# Altium PCB PCB.PcbDoc
Units mm, origin at the board's own origin, x right, y up, seen from the top; angles counter-clockwise.
Board outline 100 x 70 mm, 2 copper layers (Top Layer, Bottom Layer); 25 components, 41 nets, 129 pads, 9 vias.
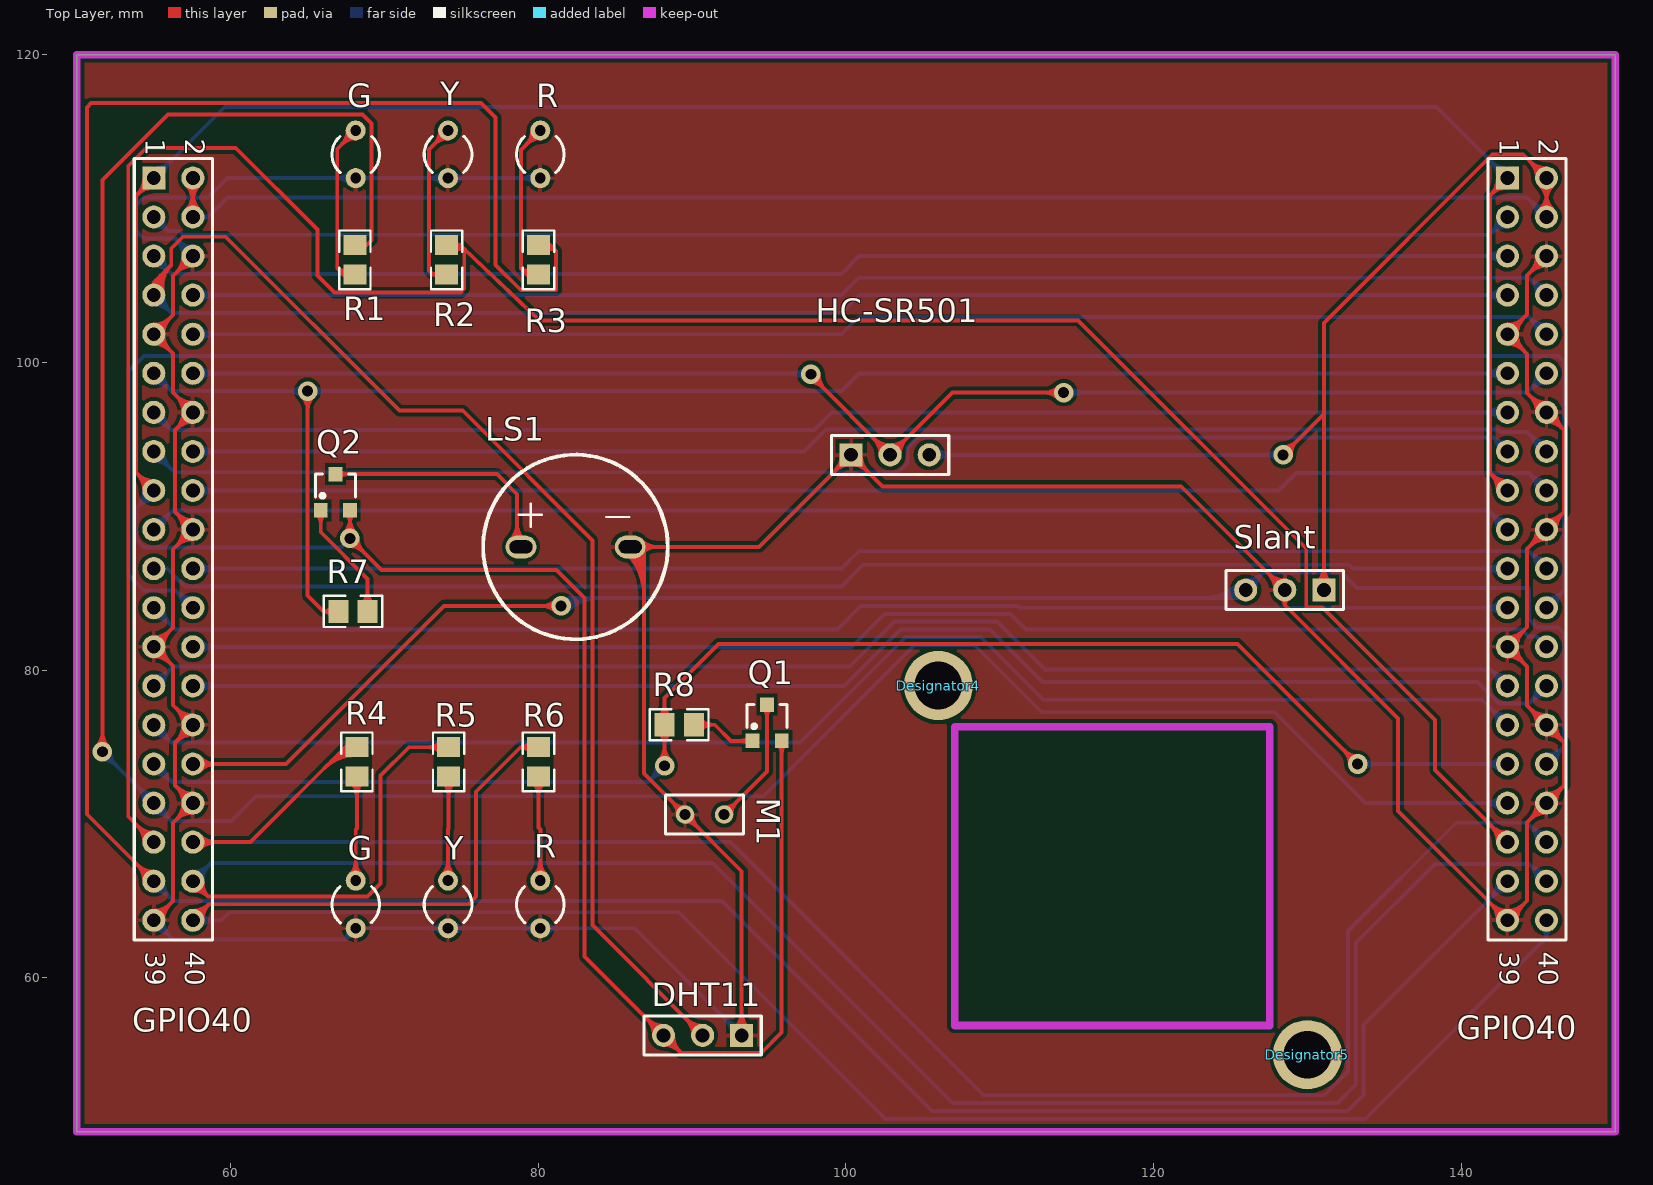
[diagram p0: Top Layer view]
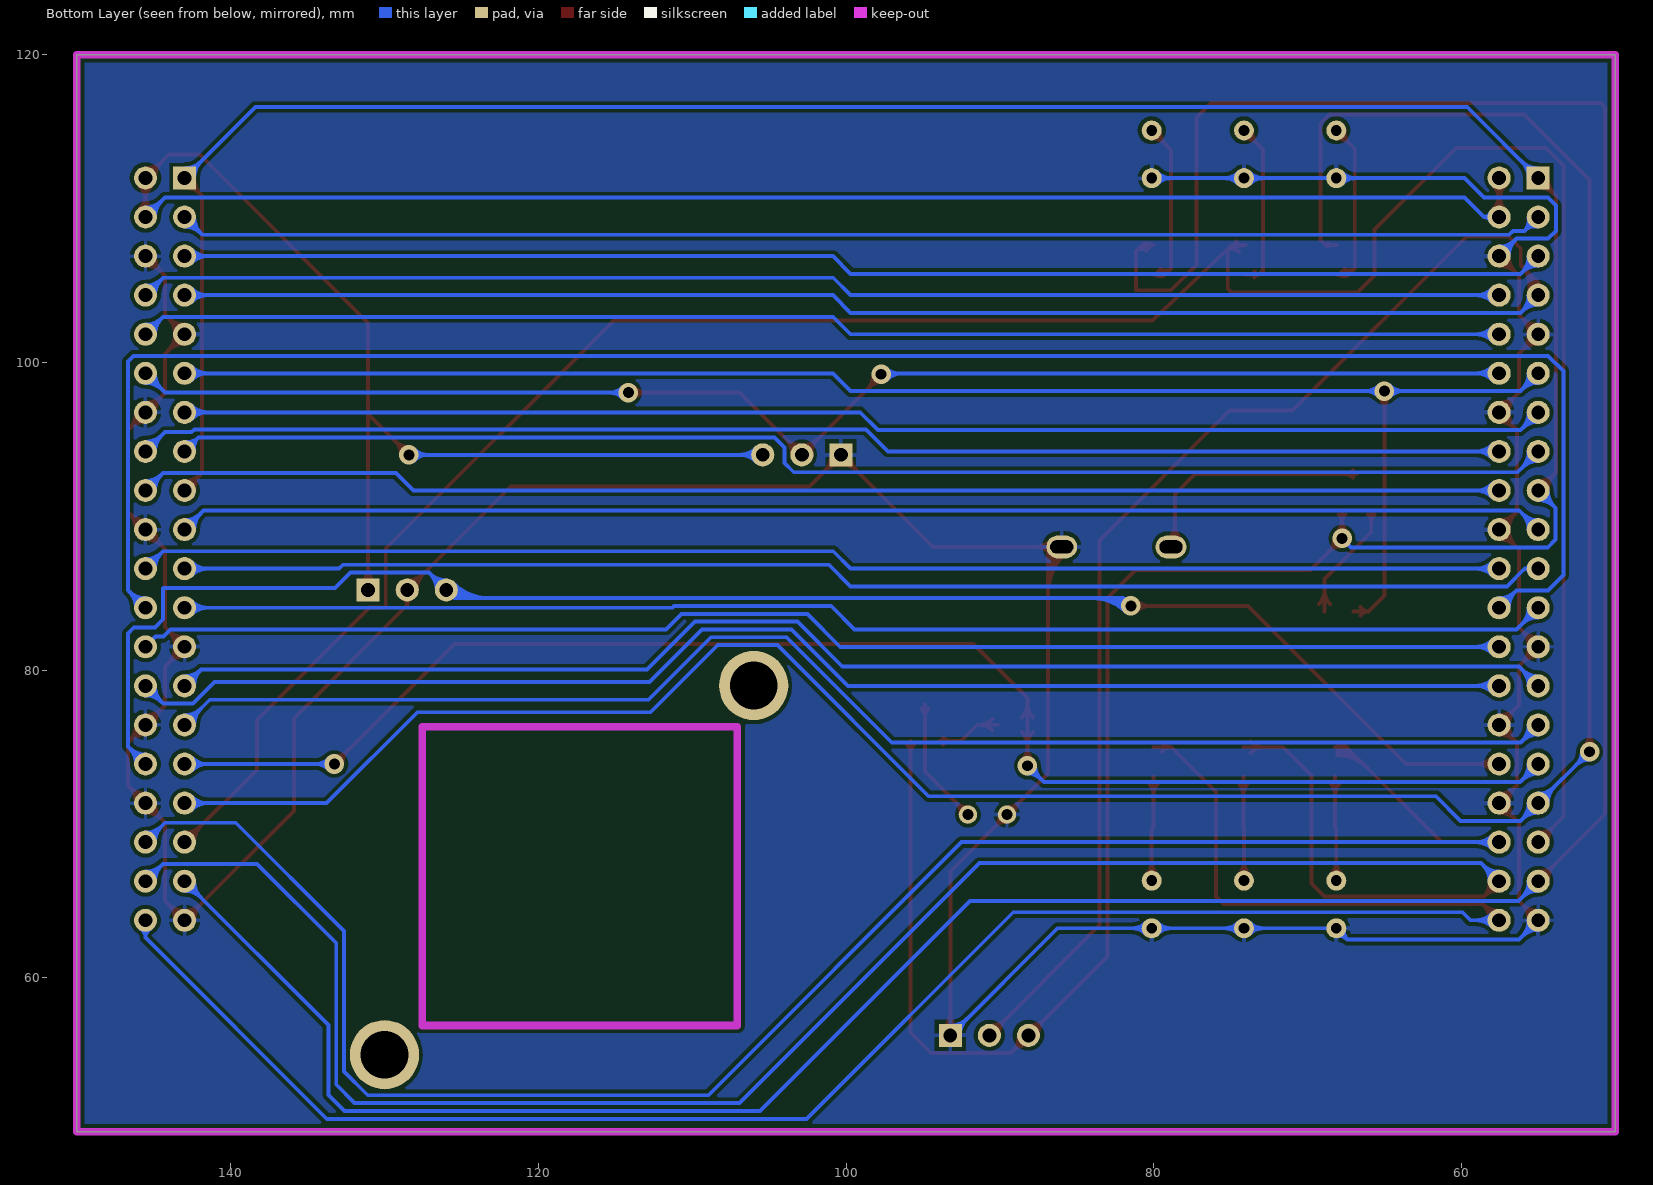
[diagram p1: Bottom Layer view, seen from below]

## Layer stack, top to bottom
Top Layer: signal copper 0.0356
Dielectric: dielectric 0.32, FR-4, Dk 4.8
Bottom Layer: signal copper 0.0356

## Board outline
50,50 150,50 150,120 50,120

## Design rules (kind name [scope] priority, off if disabled: settings)
Clearance [All] p1: gap=0.254
PolygonConnect [All] p1: connectstyle=Relief reliefconductorwidth=0.254 reliefentries=4 polygonreliefangle="90 Angle"
RoutingVias [All] p1: holewidth=0.711 width=1.27 viastyle="Through Hole" minholewidth=0.711 minwidth=1.27 maxholewidth=0.711 maxwidth=1.27
SilkscreenOverComponentPads [All] p1: minsilkscreentomaskgap=0.254
SolderMaskExpansion [All] p1: expansion=0.102
Width [All] p1: maxlimit=0.254 minlimit=0.254 preferedwidth=0.254
27 further rules are at their usual default settings.

## Classes and differential pairs
component class Sheet: DHT11 G GPIO40 HC-SR501 LS1 M1 Q1 Q2 R R1 R2 R3 R4 R5 R6 R7 R8 Slant Y

## Components (designator, comment, footprint, x,y, rotation, side; value= is the part's Value field where it differs from the comment)
Designator4 "Comment" HOLE-4MM#1 113.665,56.515 r0 top
Designator5 "Comment" HOLE-4MM#2 130.81,55.118 r0 top
DHT11 "DHT11" HDR1X3 93.218,56.261 r180 top (schematic designator P2)
G "LED_B" R38 68.127,113.538 r0 top (schematic designator D1)
G "LED_B" R38 68.127,64.77 r0 top (schematic designator D4)
GPIO40 "GPIO40" HDR2X20 143,112 r270 top (schematic designator P1)
GPIO40 "GPIO40" HDR2X20 55,112 r270 top (schematic designator P5)
HC-SR501 "HC-SR501" HDR1X3 100.33,94 r0 top (schematic designator P4)
LS1 "Bell" BUZZ12 82.423,88.011 r0 top
M1 "Meter" RAD-0.1 90.805,70.612 r0 top
Q1 "2YT8550" SOT-23-3 94.869,76.581 r0 top
Q2 "2YT8550" SOT-23-3 66.802,91.567 r0 top
R "LED_R" R38 80.127,113.538 r0 top (schematic designator D3)
R "LED_R" R38 80.127,64.77 r0 top (schematic designator D6)
R1 "1k" R0805 68.072,106.68 r90 top
R2 "1k" R0805 74.041,106.68 r90 top
R3 "1k" R0805 80.01,106.68 r90 top
R4 "1k" R0805 68.199,74.041 r270 top
R5 "1k" R0805 74.168,74.041 r270 top
R6 "1k" R0805 80.01,74.041 r270 top
R7 "1k" R0805 67.945,83.82 r0 top
R8 "1k" R0805 89.154,76.454 r0 top
Slant "Slant" HDR1X3 131.064,85.217 r180 top (schematic designator P3)
Y "LED_Y" R38 74.127,113.538 r0 top (schematic designator D2)
Y "LED_Y" R38 74.127,64.77 r0 top (schematic designator D5)

## Footprints (in the part's own frame and the unit in brackets; to place one, negate y for a bottom-side part, rotate by r counter-clockwise, add the part's x,y. Pads: shape width x height; smd on the part's side, far side on the other; paste and mask are expansions set on the pad)
BUZZ12 [mm]
  oval 2x1.5 hole 0.85 slot 1.5 at 0 deg: 1(-3.55,0) 2(3.55,0)
  silkscreen extent -6.01,-6 5.99,6
HDR1X3 [mm] "Connector; Header; 3 Position"
  rect 1.5x1.5 hole 0.9: 1(0,0)
  round 1.5 hole 0.9: 2(2.54,0) 3(5.08,0)
  silkscreen extent -1.27,-1.27 6.35,1.27
HDR2X20 [mm] "Connector; Header; 20x2 Position"
  rect 1.5x1.5 hole 0.9: 1(0,0)
  round 1.5 hole 0.9: 2(0,2.54) 3(2.54,0) 4(2.54,2.54) 5(5.08,0) 6(5.08,2.54) 7(7.62,0) 8(7.62,2.54) 9(10.16,0) 10(10.16,2.54) 11(12.7,0) 12(12.7,2.54) 13(15.24,0) 14(15.24,2.54) 15(17.78,0) 16(17.78,2.54) 17(20.32,0) 18(20.32,2.54) 19(22.86,0) 20(22.86,2.54) 21(25.4,0) 22(25.4,2.54) 23(27.94,0) 24(27.94,2.54) 25(30.48,0) 26(30.48,2.54) 27(33.02,0) 28(33.02,2.54) 29(35.56,0) 30(35.56,2.54) 31(38.1,0) 32(38.1,2.54) 33(40.64,0) 34(40.64,2.54) 35(43.18,0) 36(43.18,2.54) 37(45.72,0) 38(45.72,2.54) 39(48.26,0) 40(48.26,2.54)
  silkscreen extent -1.27,-1.27 49.53,3.81
HOLE-4MM#1 [mm]
  round 4.5 hole 3.1: 1(-7.665,22.485)
HOLE-4MM#2 [mm]
  round 4.5 hole 3.1: 1(-0.81,-0.118)
R38 [mm] "Crystal, Thru-Hole; 2 Leads; Body 3.1 x 8.2 mm (Dia.xH)"
  round 1.3 hole 0.7: 1(0,1.55) 2(0,-1.55)
  silkscreen extent -1.55,-1.19 1.55,1.17
R0805 [mm]
  rect 1.3x1.5 smd: 1(-0.95,0) 2(0.95,0)
  silkscreen extent -1.91,-1.02 1.91,1.02, body extent -1,-0.63 1,0.63, height 0.55
RAD-0.1 [mm] "Radial Cap, Thru-Hole; 2 Leads; 0.1 in Pin Spacing"
  round 1.2 hole 0.7: 1(-1.27,0) 2(1.27,0)
  silkscreen extent -2.54,-1.27 2.54,1.27
SOT-23-3 [mm]
  rect 0.9x0.95 smd: 1(-0.95,-1.175) 2(0.95,-1.175) 3(0,1.175)
  silkscreen extent -1.3,-0.35 1.3,1.18, body extent -1.48,-1.37 1.52,1.27, height 1.08

## Part data
DHT11 HC-SR501 Slant: library part "Header 3", "Header, 3-Pin"
G G R R Y Y: library part LED0, "Typical INFRARED GaAs LED"
GPIO40 GPIO40: library part "Header 20X2", "Header, 20-Pin, Dual row"
LS1: "Electrical Bell"
M1: "Indicating Instrument"
R1 R2 R3 R4 R5 R6 R7 R8: library part Res2, "Resistor 0603 1%"

## Via types
v1: diameter 1.27, hole 0.711, Top Layer to Bottom Layer, 9 vias

## Nets (pads, with @x,y where several pads share a name; then routed paths per layer and width w, separated by ;. In a path a pad name is that pad's centre, name@x,y a point inside that pad or via, vN(x,y) a via of type N, cw(c..) or ccw(c..) an arc to the next point about the centre after c; other vN are vias at no path point)
3.3V: DHT11.3 GPIO40.1 GPIO40.17 Q1.2 Q2.2 | length 269.4
  Top Layer w0.254: GPIO40.17@54.377,91.68 ccw(c52.873,91.68) 53.936,92.744 ccw(c55,93.807) GPIO40.17@55,92.303 ; GPIO40.1@54.377,112 cw(c52.873,112) 53.936,110.936 cw(c55,109.873) GPIO40.1@55,111.377 ; GPIO40.17@54.631,91.68 ccw(c53.74,91.68) 54.37,92.31 ccw(c55,92.94) GPIO40.17@55,92.049 ; GPIO40.1@54.631,112 cw(c53.74,112) 54.37,111.37 cw(c55,110.74) GPIO40.1@55,111.631 ; GPIO40.17@55,91.68 53.848,92.832 53.848,110.848 GPIO40.1@55,112 ; v1@67.393,88.924 ccw(c66.526,89.791) 67.752,89.791 ccw(c68.978,89.791) v1@68.111,88.924 ; Q2.2@67.524,90.139 cw(c66.972,89.587) 67.752,89.587 cw(c68.532,89.587) Q2.2@67.98,90.139 ; v1@67.752,88.057 cw(c67.752,86.83) 68.619,87.698 cw(c69.486,88.565) v1@68.26,88.565 ; Q2.2 v1(67.752,88.565) 69.804,86.512 81.178,86.512 83.007,84.684 83.007,61.392 DHT11.3 89.281,55.118 94.488,55.118 95.819,56.449 Q1.2 ; DHT11.3@87.515,56.261 ccw(c86.011,56.261) 87.074,57.325 ccw(c88.138,58.388) DHT11.3@88.138,56.884 ; DHT11.3@87.769,56.261 ccw(c86.878,56.261) 87.508,56.891 ccw(c88.138,57.521) DHT11.3@88.138,56.63 ; DHT11.3@88.138,55.638 cw(c88.138,54.134) 89.202,55.197 cw(c90.265,56.261) DHT11.3@88.761,56.261 ; DHT11.3@88.138,55.892 cw(c88.138,55.001) 88.768,55.631 cw(c89.398,56.261) DHT11.3@88.507,56.261 ; Q1.2@95.591,75.153 cw(c95.039,74.601) 95.819,74.601 cw(c96.599,74.601) Q1.2@96.047,75.153 ; GPIO40.17@142.377,91.68 ccw(c140.873,91.68) 141.936,92.744 ccw(c143,93.807) GPIO40.17@143,92.303 ; GPIO40.1@142.377,112 cw(c140.873,112) 141.936,110.936 cw(c143,109.873) GPIO40.1@143,111.377 ; GPIO40.17@142.631,91.68 ccw(c141.74,91.68) 142.37,92.31 ccw(c143,92.94) GPIO40.17@143,92.049 ; GPIO40.1@142.631,112 cw(c141.74,112) 142.37,111.37 cw(c143,110.74) GPIO40.1@143,111.631 ; GPIO40.17@143,91.68 141.859,92.821 141.859,110.859 GPIO40.1@143,112
  Bottom Layer w0.254: GPIO40.17@54.377,91.68 cw(c52.873,91.68) 53.936,90.616 cw(c55,89.553) GPIO40.17@55,91.057 ; GPIO40.17@54.631,91.68 cw(c53.74,91.68) 54.37,91.05 cw(c55,90.42) GPIO40.17@55,91.311 ; GPIO40.17@55,91.68 53.869,90.549 53.869,88.498 54.381,87.986 67.173,87.986 v1(67.752,88.565) ; GPIO40.1@55,112 59.611,116.611 138.389,116.611 GPIO40.1@143,112 ; GPIO40.1@55,112.369 ccw(c55,113.26) 55.63,112.63 ccw(c56.26,112) GPIO40.1@55.369,112 ; GPIO40.1@55,112.623 ccw(c55,114.127) 56.064,113.064 ccw(c57.127,112) GPIO40.1@55.623,112 ; GPIO40.1@142.377,112 ccw(c140.873,112) 141.936,113.064 ccw(c143,114.127) GPIO40.1@143,112.623 ; GPIO40.1@142.631,112 ccw(c141.74,112) 142.37,112.63 ccw(c143,113.26) GPIO40.1@143,112.369
5V: GPIO40.2 GPIO40.4 HC-SR501.3 Slant.1 | length 192.9
  Top Layer w0.254: GPIO40.4@57.099,109.901 ccw(c56.036,110.964) 57.54,110.964 ccw(c59.044,110.964) GPIO40.4@57.981,109.901 ; GPIO40.2@57.099,111.559 cw(c56.036,110.496) 57.54,110.496 cw(c59.044,110.496) GPIO40.2@57.981,111.559 ; GPIO40.4@57.279,109.721 ccw(c56.649,110.351) 57.54,110.351 ccw(c58.431,110.351) GPIO40.4@57.801,109.721 ; GPIO40.2@57.279,111.739 cw(c56.649,111.109) 57.54,111.109 cw(c58.431,111.109) GPIO40.2@57.801,111.739 ; GPIO40.4@57.54,109.46 GPIO40.2@57.54,112 ; v1(128.417,94) 131.064,96.647 ; v1@128.417,94.508 ccw(c128.417,95.734) 129.284,94.867 ccw(c130.151,94) v1@128.925,94 ; Slant.1@130.623,85.658 ccw(c129.56,86.721) 131.064,86.721 ccw(c132.568,86.721) Slant.1@131.505,85.658 ; Slant.1@130.803,85.478 ccw(c130.173,86.108) 131.064,86.108 ccw(c131.955,86.108) Slant.1@131.325,85.478 ; Slant.1 131.064,96.647 ; GPIO40.2@144.917,112 ccw(c143.413,112) 144.476,113.064 ccw(c145.54,114.127) GPIO40.2@145.54,112.623 ; GPIO40.4@145.099,109.901 ccw(c144.036,110.964) 145.54,110.964 ccw(c147.044,110.964) GPIO40.4@145.981,109.901 ; GPIO40.2@145.099,111.559 cw(c144.036,110.496) 145.54,110.496 cw(c147.044,110.496) GPIO40.2@145.981,111.559 ; GPIO40.2@145.171,112 ccw(c144.28,112) 144.91,112.63 ccw(c145.54,113.26) GPIO40.2@145.54,112.369 ; GPIO40.4@145.279,109.721 ccw(c144.649,110.351) 145.54,110.351 ccw(c146.431,110.351) GPIO40.4@145.801,109.721 ; GPIO40.2@145.279,111.739 cw(c144.649,111.109) 145.54,111.109 cw(c146.431,111.109) GPIO40.2@145.801,111.739 ; GPIO40.4@145.54,109.46 145.54,112 144.027,113.513 142.011,113.513 131.064,102.565 131.064,96.647
  Bottom Layer w0.254: GPIO40.4@57.54,109.46 58.531,109.46 59.79,110.719 144.281,110.719 GPIO40.4@145.54,109.46 ; GPIO40.4@58.101,109.19 cw(c58.531,108.983) 58.531,109.46 cw(c58.531,109.937) GPIO40.4@58.101,109.73 ; HC-SR501.3 v1(128.417,94) ; HC-SR501.3@105.671,93.739 cw(c106.301,93.109) 106.301,94 cw(c106.301,94.891) HC-SR501.3@105.671,94.261 ; HC-SR501.3@105.851,93.559 cw(c106.914,92.496) 106.914,94 cw(c106.914,95.504) HC-SR501.3@105.851,94.441 ; v1@128.058,93.641 ccw(c127.191,92.774) 127.191,94 ccw(c127.191,95.226) v1@128.058,94.359 ; GPIO40.4@144.917,109.46 ccw(c143.413,109.46) 144.476,110.524 ccw(c145.54,111.587) GPIO40.4@145.54,110.083 ; GPIO40.4@145.171,109.46 ccw(c144.28,109.46) 144.91,110.09 ccw(c145.54,110.72) GPIO40.4@145.54,109.829
GND: DHT11.1 G.2 GPIO40.6 GPIO40.9 GPIO40.14 GPIO40.20 GPIO40.25 GPIO40.30 GPIO40.34 GPIO40.39 HC-SR501.1 LS1.2 M1.1 R.2 Slant.2 Y.2 | length 457.1
  Top Layer w0.254: GPIO40.39@55,63.74 56.261,65.001 56.261,70.081 57.54,71.36 56.388,72.512 56.388,75.288 57.54,76.44 56.261,77.719 56.261,80.259 55,81.52 56.261,82.781 56.261,87.861 57.54,89.14 56.388,90.292 56.388,95.608 57.54,96.76 56.261,98.039 56.261,100.579 55,101.84 56.261,103.101 56.261,105.641 GPIO40.6@57.54,106.92 ; GPIO40.39@55,64.109 ccw(c55,65) 55.63,64.37 ccw(c56.26,63.74) GPIO40.39@55.369,63.74 ; GPIO40.39@55,64.363 ccw(c55,65.867) 56.064,64.804 ccw(c57.127,63.74) GPIO40.39@55.623,63.74 ; GPIO40.25@55,80.897 cw(c55,79.393) 56.064,80.456 cw(c57.127,81.52) 55.623,81.52 cw(c57.127,81.52) 56.064,82.584 cw(c55,83.647) GPIO40.25@55,82.143 ; GPIO40.25@55,81.151 cw(c55,80.26) 55.63,80.89 cw(c56.26,81.52) 55.369,81.52 cw(c56.26,81.52) 55.63,82.15 cw(c55,82.78) GPIO40.25@55,81.889 ; GPIO40.9@55,101.217 cw(c55,99.713) 56.064,100.776 cw(c57.127,101.84) 55.623,101.84 cw(c57.127,101.84) 56.064,102.904 cw(c55,103.967) GPIO40.9@55,102.463 ; GPIO40.9@55,101.471 cw(c55,100.58) 55.63,101.21 cw(c56.26,101.84) 55.369,101.84 cw(c56.26,101.84) 55.63,102.47 cw(c55,103.1) GPIO40.9@55,102.209 ; GPIO40.6@56.917,106.92 cw(c55.413,106.92) 56.476,105.856 cw(c57.54,104.793) GPIO40.6@57.54,106.297 ; GPIO40.6@57.171,106.92 cw(c56.28,106.92) 56.91,106.29 cw(c57.54,105.66) GPIO40.6@57.54,106.551 ; GPIO40.34@57.54,70.737 ccw(c57.54,69.233) 56.476,70.296 ccw(c55.413,71.36) 56.917,71.36 ccw(c55.413,71.36) 56.476,72.424 ccw(c57.54,73.487) GPIO40.34@57.54,71.983 ; GPIO40.34@57.54,70.991 ccw(c57.54,70.1) 56.91,70.73 ccw(c56.28,71.36) 57.171,71.36 ccw(c56.28,71.36) 56.91,71.99 ccw(c57.54,72.62) GPIO40.34@57.54,71.729 ; GPIO40.30@57.54,75.817 ccw(c57.54,74.313) 56.476,75.376 ccw(c55.413,76.44) 56.917,76.44 ccw(c55.413,76.44) 56.476,77.504 ccw(c57.54,78.567) GPIO40.30@57.54,77.063 ; GPIO40.30@57.54,76.071 ccw(c57.54,75.18) 56.91,75.81 ccw(c56.28,76.44) 57.171,76.44 ccw(c56.28,76.44) 56.91,77.07 ccw(c57.54,77.7) GPIO40.30@57.54,76.809 ; GPIO40.20@57.54,88.517 ccw(c57.54,87.013) 56.476,88.076 ccw(c55.413,89.14) 56.917,89.14 ccw(c55.413,89.14) 56.476,90.204 ccw(c57.54,91.267) GPIO40.20@57.54,89.763 ; GPIO40.20@57.54,88.771 ccw(c57.54,87.88) 56.91,88.51 ccw(c56.28,89.14) 57.171,89.14 ccw(c56.28,89.14) 56.91,89.77 ccw(c57.54,90.4) GPIO40.20@57.54,89.509 ; GPIO40.14@57.54,96.137 ccw(c57.54,94.633) 56.476,95.696 ccw(c55.413,96.76) 56.917,96.76 ccw(c55.413,96.76) 56.476,97.824 ccw(c57.54,98.887) GPIO40.14@57.54,97.383 ; GPIO40.14@57.54,96.391 ccw(c57.54,95.5) 56.91,96.13 ccw(c56.28,96.76) 57.171,96.76 ccw(c56.28,96.76) 56.91,97.39 ccw(c57.54,98.02) GPIO40.14@57.54,97.129 ; LS1.2@85.782,87.57 cw(c83.162,84.95) 86.868,84.95 ; LS1.2@85.962,87.75 cw(c83.775,85.563) 86.868,85.563 ; LS1.2 LS1.2@86.868,88.011 ; LS1.2@86.142,87.93 cw(c84.388,86.176) 86.868,86.176 ; LS1.2@86.321,88.109 cw(c85.001,86.789) 86.868,86.789 ; LS1.2@86.484,87.75 cw(c87.114,87.12) 87.114,88.011 cw(c87.114,88.902) LS1.2@86.484,88.272 ; LS1.2@86.501,88.289 cw(c85.615,87.403) 86.868,87.403 ; LS1.2@86.664,87.57 cw(c87.727,86.507) 87.727,88.011 cw(c87.727,89.515) LS1.2@86.664,88.452 ; M1.1@89.062,70.612 ccw(c87.92,70.612) 88.728,71.419 ccw(c89.535,72.227) M1.1@89.535,71.085 ; M1.1@89.535,70.139 cw(c89.535,68.997) 90.342,69.805 cw(c91.15,70.612) M1.1@90.008,70.612 ; DHT11.1@92.777,56.702 ccw(c91.714,57.765) 93.218,57.765 ccw(c94.722,57.765) DHT11.1@93.659,56.702 ; DHT11.1@92.957,56.522 ccw(c92.327,57.152) 93.218,57.152 ccw(c94.109,57.152) DHT11.1@93.479,56.522 ; DHT11.1 93.218,66.929 M1.1 86.868,73.279 LS1.2@86.868,88.011 ; HC-SR501.1@99.707,94 cw(c98.203,94) 99.266,92.936 cw(c100.33,91.873) 100.33,93.377 cw(c100.33,91.873) 101.394,92.936 cw(c102.457,94) HC-SR501.1@100.953,94 ; HC-SR501.1@99.961,94 cw(c99.07,94) 99.7,93.37 cw(c100.33,92.74) 100.33,93.631 cw(c100.33,92.74) 100.96,93.37 cw(c101.59,94) HC-SR501.1@100.699,94 ; Slant.2@127.901,85.217 ccw(c126.397,85.217) 127.46,86.281 ccw(c128.524,87.344) Slant.2@128.524,85.84 ; Slant.2@128.155,85.217 ccw(c127.264,85.217) 127.894,85.847 ccw(c128.524,86.477) Slant.2@128.524,85.586 ; Slant.2@128.254,84.656 cw(c128.047,84.226) 128.524,84.226 ; Slant.2@128.794,84.656 ccw(c129.001,84.226) 128.524,84.226 ; GPIO40.39@142.377,63.74 ccw(c140.873,63.74) 141.936,64.804 ccw(c143,65.867) 143,64.363 ccw(c143,65.867) 144.064,64.804 ccw(c145.127,63.74) GPIO40.39@143.623,63.74 ; GPIO40.39@142.631,63.74 ccw(c141.74,63.74) 142.37,64.37 ccw(c143,65) 143,64.109 ccw(c143,65) 143.63,64.37 ccw(c144.26,63.74) GPIO40.39@143.369,63.74 ; GPIO40.25@143,80.897 cw(c143,79.393) 144.064,80.456 cw(c145.127,81.52) 143.623,81.52 cw(c145.127,81.52) 144.064,82.584 cw(c143,83.647) GPIO40.25@143,82.143 ; GPIO40.25@143,81.151 cw(c143,80.26) 143.63,80.89 cw(c144.26,81.52) 143.369,81.52 cw(c144.26,81.52) 143.63,82.15 cw(c143,82.78) GPIO40.25@143,81.889 ; GPIO40.9@143,101.217 cw(c143,99.713) 144.064,100.776 cw(c145.127,101.84) 143.623,101.84 cw(c145.127,101.84) 144.064,102.904 cw(c143,103.967) GPIO40.9@143,102.463 ; GPIO40.9@143,101.471 cw(c143,100.58) 143.63,101.21 cw(c144.26,101.84) 143.369,101.84 cw(c144.26,101.84) 143.63,102.47 cw(c143,103.1) GPIO40.9@143,102.209 ; GPIO40.34@144.917,71.36 cw(c143.413,71.36) 144.476,70.296 cw(c145.54,69.233) GPIO40.34@145.54,70.737 ; GPIO40.30@144.917,76.44 ccw(c143.413,76.44) 144.476,77.504 ccw(c145.54,78.567) GPIO40.30@145.54,77.063 ; GPIO40.20@144.917,89.14 cw(c143.413,89.14) 144.476,88.076 cw(c145.54,87.013) GPIO40.20@145.54,88.517 ; GPIO40.14@144.917,96.76 ccw(c143.413,96.76) 144.476,97.824 ccw(c145.54,98.887) GPIO40.14@145.54,97.383 ; GPIO40.6@144.917,106.92 cw(c143.413,106.92) 144.476,105.856 cw(c145.54,104.793) GPIO40.6@145.54,106.297 ; GPIO40.34@145.171,71.36 cw(c144.28,71.36) 144.91,70.73 cw(c145.54,70.1) GPIO40.34@145.54,70.991 ; GPIO40.30@145.171,76.44 ccw(c144.28,76.44) 144.91,77.07 ccw(c145.54,77.7) GPIO40.30@145.54,76.809 ; GPIO40.20@145.171,89.14 cw(c144.28,89.14) 144.91,88.51 cw(c145.54,87.88) GPIO40.20@145.54,88.771 ; GPIO40.14@145.171,96.76 ccw(c144.28,96.76) 144.91,97.39 ccw(c145.54,98.02) GPIO40.14@145.54,97.129 ; GPIO40.6@145.171,106.92 cw(c144.28,106.92) 144.91,106.29 cw(c145.54,105.66) GPIO40.6@145.54,106.551 ; GPIO40.34@145.54,71.729 ccw(c145.54,72.62) 146.17,71.99 ccw(c146.8,71.36) GPIO40.34@145.909,71.36 ; GPIO40.34@145.54,71.983 ccw(c145.54,73.487) 146.604,72.424 ccw(c147.667,71.36) GPIO40.34@146.163,71.36 ; GPIO40.30@145.54,75.817 cw(c145.54,74.313) 146.604,75.376 cw(c147.667,76.44) GPIO40.30@146.163,76.44 ; GPIO40.30@145.54,76.071 cw(c145.54,75.18) 146.17,75.81 cw(c146.8,76.44) GPIO40.30@145.909,76.44 ; GPIO40.20@145.54,89.509 ccw(c145.54,90.4) 146.17,89.77 ccw(c146.8,89.14) GPIO40.20@145.909,89.14 ; GPIO40.20@145.54,89.763 ccw(c145.54,91.267) 146.604,90.204 ccw(c147.667,89.14) GPIO40.20@146.163,89.14 ; GPIO40.14@145.54,96.137 cw(c145.54,94.633) 146.604,95.696 cw(c147.667,96.76) GPIO40.14@146.163,96.76 ; GPIO40.14@145.54,96.391 cw(c145.54,95.5) 146.17,96.13 cw(c146.8,96.76) GPIO40.14@145.909,96.76 ; GPIO40.6@145.54,106.92 144.272,105.652 144.272,103.112 143,101.84 144.272,100.568 144.272,98.028 145.54,96.76 146.685,95.615 146.685,90.285 145.54,89.14 144.272,87.872 144.272,82.792 143,81.52 144.272,80.248 144.272,77.708 145.54,76.44 146.685,75.295 146.685,72.505 145.54,71.36 144.272,70.092 144.272,65.012 143,63.74 135.89,70.85 135.89,76.86 128.524,84.226 ; LS1.2@86.868,88.011 94.341,88.011 HC-SR501.1 102.382,91.948 121.793,91.948 Slant.2 128.524,84.226
  Bottom Layer w0.254: GPIO40.39@55,63.117 cw(c55,61.613) 56.064,62.676 cw(c57.127,63.74) GPIO40.39@55.623,63.74 ; GPIO40.39@55,63.371 cw(c55,62.48) 55.63,63.11 cw(c56.26,63.74) GPIO40.39@55.369,63.74 ; GPIO40.39@55,63.74 56.256,62.484 67.391,62.484 ; GPIO40.6@56.917,106.92 ccw(c55.413,106.92) 56.476,107.984 ccw(c57.54,109.047) GPIO40.6@57.54,107.543 ; GPIO40.6@57.171,106.92 ccw(c56.28,106.92) 56.91,107.55 ccw(c57.54,108.18) GPIO40.6@57.54,107.289 ; GPIO40.6@57.54,106.92 56.409,108.051 54.356,108.051 53.848,108.559 53.848,110.211 54.356,110.719 58.522,110.719 59.791,111.988 68.127,111.988 74.127,111.988 R.2@80.127,111.988 ; G.2@67.61,63.144 cw(c66.844,63.031) 67.391,62.484 ; G.2@67.757,111.618 ccw(c66.864,110.725) 66.864,111.988 ccw(c66.864,113.251) G.2@67.757,112.358 ; G.2@68.051,62.703 ccw(c67.938,61.937) 67.391,62.484 ; Y.2@73.757,62.85 ccw(c72.864,61.957) 72.864,63.22 ccw(c72.864,64.483) Y.2@73.757,63.59 ; Y.2@73.757,111.618 ccw(c72.864,110.725) 72.864,111.988 ccw(c72.864,113.251) Y.2@73.757,112.358 ; Y.2@74.497,62.85 cw(c75.39,61.957) 75.39,63.22 cw(c75.39,64.483) Y.2@74.497,63.59 ; Y.2@74.497,111.618 cw(c75.39,110.725) 75.39,111.988 cw(c75.39,113.251) Y.2@74.497,112.358 ; R.2@79.757,62.85 ccw(c78.864,61.957) 78.864,63.22 ccw(c78.864,64.483) R.2@79.757,63.59 ; R.2@79.757,111.618 ccw(c78.864,110.725) 78.864,111.988 ccw(c78.864,113.251) R.2@79.757,112.358 ; R.2@80.497,62.85 cw(c81.39,61.957) 81.39,63.22 cw(c81.39,64.483) R.2@80.497,63.59 ; DHT11.1@92.595,56.261 ccw(c91.091,56.261) 92.154,57.325 ccw(c93.218,58.388) DHT11.1@93.218,56.884 ; DHT11.1@92.849,56.261 ccw(c91.958,56.261) 92.588,56.891 ccw(c93.218,57.521) DHT11.1@93.218,56.63 ; DHT11.1 86.259,63.22 80.127,63.22 74.127,63.22 68.127,63.22 67.391,62.484
GPIO2: GPIO40.3 | length 95.6
  Bottom Layer w0.254: GPIO40.3@55,109.46 55.901,108.559 56.639,108.559 56.892,108.306 141.846,108.306 GPIO40.3@143,109.46 ; GPIO40.3@55.046,109.094 cw(c55.118,108.511) 55.534,108.926 cw(c55.949,109.342) GPIO40.3@55.366,109.414 ; GPIO40.3@55.077,108.842 cw(c55.2,107.858) 55.901,108.559 cw(c56.602,109.26) GPIO40.3@55.618,109.383 ; GPIO40.3@142.377,109.46 cw(c140.873,109.46) 141.936,108.396 cw(c143,107.333) GPIO40.3@143,108.837 ; GPIO40.3@142.631,109.46 cw(c141.74,109.46) 142.37,108.83 cw(c143,108.2) GPIO40.3@143,109.091
GPIO3: GPIO40.5 | length 96.5
  Bottom Layer w0.254: GPIO40.5@55,106.297 cw(c55,104.793) 56.064,105.856 cw(c57.127,106.92) GPIO40.5@55.623,106.92 ; GPIO40.5@55,106.551 cw(c55,105.66) 55.63,106.29 cw(c56.26,106.92) GPIO40.5@55.369,106.92 ; GPIO40.5@55,106.92 56.154,105.766 99.695,105.766 100.849,106.92 GPIO40.5@143,106.92 ; GPIO40.5@142.559,106.479 ccw(c141.496,105.416) 141.496,106.92 ccw(c141.496,108.424) GPIO40.5@142.559,107.361 ; GPIO40.5@142.739,106.659 ccw(c142.109,106.029) 142.109,106.92 ccw(c142.109,107.811) GPIO40.5@142.739,107.181
GPIO4: DHT11.2 GPIO40.7 | length 181.5
  Top Layer w0.254: GPIO40.7@54.828,104.979 ccw(c54.763,105.207) 55,105.207 ; GPIO40.7@54.864,104.349 cw(c55.931,104.591) 55.158,105.364 ; GPIO40.7@55,104.38 55,105.207 ; GPIO40.7@55.112,104.405 cw(c56.461,104.712) 55.483,105.69 ; GPIO40.7@55.172,104.979 cw(c55.237,105.207) 55,105.207 ; GPIO40.7@55.36,104.462 cw(c56.992,104.832) 55.808,106.015 ; GPIO40.7@55.608,104.518 cw(c57.522,104.952) 56.134,106.341 ; DHT11.2@90.055,56.261 ccw(c88.551,56.261) 89.614,57.325 ccw(c90.678,58.388) DHT11.2@90.678,56.884 ; DHT11.2@90.309,56.261 ccw(c89.418,56.261) 90.048,56.891 ccw(c90.678,57.521) DHT11.2@90.678,56.63 ; DHT11.2 83.515,63.424 83.515,88.443 75.082,96.876 70.968,96.876 59.665,108.179 56.896,108.179 56.134,107.417 56.134,106.341 ; 55,105.207 56.134,106.341
  Bottom Layer w0.254: GPIO40.7@55,103.757 cw(c55,102.253) 56.064,103.316 cw(c57.127,104.38) GPIO40.7@55.623,104.38 ; GPIO40.7@55,104.011 cw(c55,103.12) 55.63,103.75 cw(c56.26,104.38) GPIO40.7@55.369,104.38 ; GPIO40.7@55,104.38 56.154,103.226 99.695,103.226 100.849,104.38 GPIO40.7@143,104.38 ; GPIO40.7@142.559,103.939 ccw(c141.496,102.876) 141.496,104.38 ccw(c141.496,105.884) GPIO40.7@142.559,104.821 ; GPIO40.7@142.739,104.119 ccw(c142.109,103.489) 142.109,104.38 ccw(c142.109,105.271) GPIO40.7@142.739,104.641
GPIO5: GPIO40.29 | length 101.2
  Bottom Layer w0.254: GPIO40.29@55,75.817 cw(c55,74.313) 56.064,75.376 cw(c57.127,76.44) GPIO40.29@55.623,76.44 ; GPIO40.29@55,76.071 cw(c55,75.18) 55.63,75.81 cw(c56.26,76.44) GPIO40.29@55.369,76.44 ; GPIO40.29@55,76.44 56.154,75.286 97.024,75.286 103.877,82.139 108.788,82.139 112.847,78.08 141.36,78.08 GPIO40.29@143,76.44 ; GPIO40.29@142.377,76.44 ccw(c140.873,76.44) 141.936,77.504 ccw(c143,78.567) GPIO40.29@143,77.063 ; GPIO40.29@142.631,76.44 ccw(c141.74,76.44) 142.37,77.07 ccw(c143,77.7) GPIO40.29@143,76.809
GPIO6: GPIO40.31 R8.1 | length 117.2
  Top Layer w0.254: R8.1@87.834,75.984 cw(c86.941,75.091) 88.204,75.091 cw(c89.467,75.091) R8.1@88.574,75.984 ; R8.1@87.834,76.924 ccw(c86.941,77.817) 88.204,77.817 ccw(c89.467,77.817) R8.1@88.574,76.924 ; v1@87.845,74.146 ccw(c86.978,75.013) 88.204,75.013 ccw(c89.43,75.013) v1@88.563,74.146 ; v1(88.204,73.787) R8.1 88.204,78.196 91.719,81.712 125.451,81.712 v1(133.262,73.9) ; v1@132.754,73.9 ccw(c131.528,73.9) 132.395,74.767 ccw(c133.262,75.634) v1@133.262,74.408
  Bottom Layer w0.254: GPIO40.31@55,73.277 cw(c55,71.773) 56.064,72.836 cw(c57.127,73.9) GPIO40.31@55.623,73.9 ; GPIO40.31@55,73.531 cw(c55,72.64) 55.63,73.27 cw(c56.26,73.9) GPIO40.31@55.369,73.9 ; GPIO40.31@55,73.9 56.18,72.72 87.137,72.72 v1(88.204,73.787) ; v1@87.696,73.787 cw(c86.47,73.787) 87.337,72.92 cw(c88.204,72.053) v1@88.204,73.279 ; v1(133.262,73.9) GPIO40.31@143,73.9 ; v1@133.622,73.541 cw(c134.489,72.674) 134.489,73.9 cw(c134.489,75.126) v1@133.622,74.259 ; GPIO40.31@142.559,73.459 ccw(c141.496,72.396) 141.496,73.9 ccw(c141.496,75.404) GPIO40.31@142.559,74.341 ; GPIO40.31@142.739,73.639 ccw(c142.109,73.009) 142.109,73.9 ccw(c142.109,74.791) GPIO40.31@142.739,74.161
GPIO7: GPIO40.26 | length 93.5
  Bottom Layer w0.254: GPIO40.26@57.54,81.52 100.372,81.52 102.515,83.663 110.698,83.663 111.71,82.652 143.901,82.652 144.376,82.177 144.883,82.177 GPIO40.26@145.54,81.52 ; GPIO40.26@57.801,81.259 cw(c58.431,80.629) 58.431,81.52 cw(c58.431,82.411) GPIO40.26@57.801,81.781 ; GPIO40.26@57.981,81.079 cw(c59.044,80.016) 59.044,81.52 cw(c59.044,83.024) GPIO40.26@57.981,81.961
GPIO8: GPIO40.24 | length 136.2
  Bottom Layer w0.254: GPIO40.24@56.917,84.06 ccw(c55.413,84.06) 56.476,85.124 ccw(c57.54,86.187) GPIO40.24@57.54,84.683 ; GPIO40.24@57.171,84.06 ccw(c56.28,84.06) 56.91,84.69 ccw(c57.54,85.32) GPIO40.24@57.54,84.429 ; GPIO40.24@57.54,84.06 56.408,85.192 54.356,85.192 53.361,86.187 53.361,99.437 54.356,100.432 146.329,100.432 146.685,100.076 146.685,85.205 GPIO40.24@145.54,84.06 ; GPIO40.24@145.54,84.429 ccw(c145.54,85.32) 146.17,84.69 ccw(c146.8,84.06) GPIO40.24@145.909,84.06 ; GPIO40.24@145.54,84.683 ccw(c145.54,86.187) 146.604,85.124 ccw(c147.667,84.06) GPIO40.24@146.163,84.06
GPIO9: GPIO40.21 | length 93.7
  Bottom Layer w0.254: GPIO40.21@55,86.6 55.877,86.6 ; GPIO40.21@55.588,86.395 cw(c55.877,86.294) 55.877,86.6 ; GPIO40.21@55.588,86.805 ccw(c55.877,86.906) 55.877,86.6 ; GPIO40.21@142.559,86.159 ccw(c141.496,85.096) 141.496,86.6 ccw(c141.496,88.104) GPIO40.21@142.559,87.041 ; GPIO40.21@142.739,86.339 ccw(c142.109,85.709) 142.109,86.6 ccw(c142.109,87.491) GPIO40.21@142.739,86.861 ; GPIO40.21@143,86.6 132.959,86.6 132.703,86.856 101.105,86.856 99.695,85.446 57.031,85.446 55.877,86.6
GPIO10: GPIO40.19 | length 96.5
  Bottom Layer w0.254: GPIO40.19@55,89.14 56.233,90.373 141.767,90.373 GPIO40.19@143,89.14 ; GPIO40.19@55,89.509 ccw(c55,90.4) 55.63,89.77 ccw(c56.26,89.14) GPIO40.19@55.369,89.14 ; GPIO40.19@55,89.763 ccw(c55,91.267) 56.064,90.204 ccw(c57.127,89.14) GPIO40.19@55.623,89.14 ; GPIO40.19@142.377,89.14 ccw(c140.873,89.14) 141.936,90.204 ccw(c143,91.267) GPIO40.19@143,89.763 ; GPIO40.19@142.631,89.14 ccw(c141.74,89.14) 142.37,89.77 ccw(c143,90.4) GPIO40.19@143,89.509
GPIO11: GPIO40.23 | length 96.8
  Bottom Layer w0.254: GPIO40.23@55,83.437 cw(c55,81.933) 56.064,82.996 cw(c57.127,84.06) GPIO40.23@55.623,84.06 ; GPIO40.23@55,83.691 cw(c55,82.8) 55.63,83.43 cw(c56.26,84.06) GPIO40.23@55.369,84.06 ; GPIO40.23@55,84.06 56.408,82.652 99.441,82.652 100.96,84.171 111.171,84.171 111.282,84.06 GPIO40.23@143,84.06 ; GPIO40.23@142.559,83.619 ccw(c141.496,82.556) 141.496,84.06 ccw(c141.496,85.564) GPIO40.23@142.559,84.501 ; GPIO40.23@142.739,83.799 ccw(c142.109,83.169) 142.109,84.06 ccw(c142.109,84.951) GPIO40.23@142.739,84.321
GPIO12: GPIO40.32 Slant.3 | length 133.3
  Top Layer w0.254: GPIO40.32@57.54,73.9 63.588,73.9 73.863,84.176 v1(81.483,84.176) ; GPIO40.32@57.801,73.639 cw(c58.431,73.009) 58.431,73.9 cw(c58.431,74.791) GPIO40.32@57.801,74.161 ; GPIO40.32@57.981,73.459 cw(c59.044,72.396) 59.044,73.9 cw(c59.044,75.404) GPIO40.32@57.981,74.341 ; v1@81.124,83.816 ccw(c80.257,82.949) 80.257,84.176 ccw(c80.257,85.402) v1@81.124,84.535
  Bottom Layer w0.254: v1@81.304,84.355 cw(c82.096,83.562) 82.096,84.684 ; v1@81.663,83.996 cw(c83.323,82.336) 83.323,84.684 ; v1@81.842,83.816 cw(c83.936,81.723) 83.936,84.684 ; 82.71,84.684 ccw(c82.71,82.949) v1(81.483,84.176) 81.991,84.684 125.451,84.684 Slant.3 127.115,86.348 132.207,86.348 133.211,85.344 144.374,85.344 144.399,85.319 144.399,83.312 144.932,82.779 146.304,82.779 146.685,82.398 146.685,75.045 GPIO40.32@145.54,73.9 ; 123.192,84.684 ccw(c123.192,88.009) Slant.3@125.543,85.658 ; 123.805,84.684 ccw(c123.805,87.396) Slant.3@125.723,85.478 ; 124.419,84.684 ccw(c124.419,86.782) Slant.3@125.903,85.298 ; 125.032,84.684 ccw(c125.032,86.169) Slant.3@126.082,85.119 ; Slant.3@125.984,85.586 ccw(c125.984,86.477) 126.614,85.847 ccw(c127.244,85.217) Slant.3@126.353,85.217 ; Slant.3@125.984,85.84 ccw(c125.984,87.344) 127.048,86.281 ccw(c128.111,85.217) Slant.3@126.607,85.217 ; GPIO40.32@145.54,74.269 ccw(c145.54,75.16) 146.17,74.53 ccw(c146.8,73.9) GPIO40.32@145.909,73.9 ; GPIO40.32@145.54,74.523 ccw(c145.54,76.027) 146.604,74.964 ccw(c147.667,73.9) GPIO40.32@146.163,73.9
GPIO13: GPIO40.33 R1.2 | length 183.3
  Top Layer w0.254: v1@51.304,75.056 ccw(c50.437,75.923) 51.664,75.923 ccw(c52.89,75.923) v1@52.023,75.056 ; v1(51.664,74.696) 51.664,111.862 55.931,116.129 68.58,116.129 69.164,115.545 69.164,107.95 68.844,107.63 ; R1.2 68.844,107.63 ; R1.2@68.679,107.501 cw(c68.844,107.46) 68.844,107.63 ; R1.2@68.679,107.759 ccw(c68.844,107.8) 68.844,107.63
  Bottom Layer w0.254: v1@51.664,74.188 cw(c51.664,72.962) 52.531,73.829 cw(c53.398,74.696) v1@52.172,74.696 ; v1(51.664,74.696) 55,71.36 56.154,70.206 60.046,70.206 61.646,71.806 94.64,71.806 104.466,81.631 108.34,81.631 112.704,77.267 127.864,77.267 133.77,71.36 GPIO40.33@143,71.36 ; GPIO40.33@54.377,71.36 ccw(c52.873,71.36) 53.936,72.424 ccw(c55,73.487) GPIO40.33@55,71.983 ; GPIO40.33@54.631,71.36 ccw(c53.74,71.36) 54.37,71.99 ccw(c55,72.62) GPIO40.33@55,71.729 ; GPIO40.33@55,70.737 cw(c55,69.233) 56.064,70.296 cw(c57.127,71.36) GPIO40.33@55.623,71.36 ; GPIO40.33@55,70.991 cw(c55,70.1) 55.63,70.73 cw(c56.26,71.36) GPIO40.33@55.369,71.36 ; GPIO40.33@142.559,70.919 ccw(c141.496,69.856) 141.496,71.36 ccw(c141.496,72.864) GPIO40.33@142.559,71.801 ; GPIO40.33@142.739,71.099 ccw(c142.109,70.469) 142.109,71.36 ccw(c142.109,72.251) GPIO40.33@142.739,71.621
GPIO14: GPIO40.8 | length 96.5
  Bottom Layer w0.254: GPIO40.8@57.54,104.38 99.695,104.38 100.827,105.512 144.408,105.512 GPIO40.8@145.54,104.38 ; GPIO40.8@57.801,104.119 cw(c58.431,103.489) 58.431,104.38 cw(c58.431,105.271) GPIO40.8@57.801,104.641 ; GPIO40.8@57.981,103.939 cw(c59.044,102.876) 59.044,104.38 cw(c59.044,105.884) GPIO40.8@57.981,104.821 ; GPIO40.8@144.917,104.38 ccw(c143.413,104.38) 144.476,105.444 ccw(c145.54,106.507) GPIO40.8@145.54,105.003 ; GPIO40.8@145.171,104.38 ccw(c144.28,104.38) 144.91,105.01 ccw(c145.54,105.64) GPIO40.8@145.54,104.749
GPIO15: GPIO40.10 | length 96.5
  Bottom Layer w0.254: GPIO40.10@57.54,101.84 99.695,101.84 100.827,102.972 144.408,102.972 GPIO40.10@145.54,101.84 ; GPIO40.10@57.801,101.579 cw(c58.431,100.949) 58.431,101.84 cw(c58.431,102.731) GPIO40.10@57.801,102.101 ; GPIO40.10@57.981,101.399 cw(c59.044,100.336) 59.044,101.84 cw(c59.044,103.344) GPIO40.10@57.981,102.281 ; GPIO40.10@144.917,101.84 ccw(c143.413,101.84) 144.476,102.904 ccw(c145.54,103.967) GPIO40.10@145.54,102.463 ; GPIO40.10@145.171,101.84 ccw(c144.28,101.84) 144.91,102.47 ccw(c145.54,103.1) GPIO40.10@145.54,102.209
GPIO16: GPIO40.36 R4.1 | length 138.9
  Top Layer w0.254: GPIO40.36@57.54,68.82 61.276,68.82 67.447,74.991 ; GPIO40.36@57.801,68.559 cw(c58.431,67.929) 58.431,68.82 cw(c58.431,69.711) GPIO40.36@57.801,69.081 ; GPIO40.36@57.981,68.379 cw(c59.044,67.316) 59.044,68.82 cw(c59.044,70.324) GPIO40.36@57.981,69.261 ; 66.094,73.637 cw(c68.099,71.632) R4.1@68.099,74.468 ; 66.527,74.071 cw(c68.099,72.499) R4.1@68.099,74.722 ; 66.961,74.505 cw(c68.099,73.366) R4.1@68.099,74.976 ; 67.394,74.938 cw(c68.099,74.233) R4.1@68.099,75.23 ; R4.1@67.588,74.878 ccw(c67.447,74.846) 67.447,74.991 ; R4.1@67.588,75.104 cw(c67.447,75.136) 67.447,74.991 ; R4.1 67.447,74.991
  Bottom Layer w0.254: GPIO40.36@57.54,68.82 92.495,68.82 108.946,52.369 131.09,52.369 132.631,53.91 132.631,63.035 139.675,70.079 144.281,70.079 GPIO40.36@145.54,68.82 ; GPIO40.36@57.801,68.559 cw(c58.431,67.929) 58.431,68.82 cw(c58.431,69.711) GPIO40.36@57.801,69.081 ; GPIO40.36@57.981,68.379 cw(c59.044,67.316) 59.044,68.82 cw(c59.044,70.324) GPIO40.36@57.981,69.261 ; GPIO40.36@144.917,68.82 ccw(c143.413,68.82) 144.476,69.884 ccw(c145.54,70.947) GPIO40.36@145.54,69.443 ; GPIO40.36@145.171,68.82 ccw(c144.28,68.82) 144.91,69.45 ccw(c145.54,70.08) GPIO40.36@145.54,69.189
GPIO17: GPIO40.11 R7.1 | length 119.2
  Top Layer w0.254: v1@64.639,97.786 cw(c63.772,96.919) 64.999,96.919 cw(c66.225,96.919) v1@65.358,97.786 ; v1(64.999,98.146) 64.999,84.861 66.04,83.82 ; R7.1@66.554,83.538 ccw(c66.04,83.21) 66.04,83.82 ; R7.1@66.554,84.102 cw(c66.04,84.43) 66.04,83.82 ; R7.1 66.04,83.82
  Bottom Layer w0.254: GPIO40.11@55,98.677 cw(c55,97.173) 56.064,98.236 cw(c57.127,99.3) GPIO40.11@55.623,99.3 ; GPIO40.11@55,98.931 cw(c55,98.04) 55.63,98.67 cw(c56.26,99.3) GPIO40.11@55.369,99.3 ; GPIO40.11@55,99.3 56.154,98.146 v1(64.999,98.146) 99.695,98.146 100.849,99.3 GPIO40.11@143,99.3 ; v1@64.639,97.786 ccw(c63.772,96.919) 63.772,98.146 ccw(c63.772,99.372) v1@64.639,98.505 ; v1@65.358,97.786 cw(c66.225,96.919) 66.225,98.146 cw(c66.225,99.372) v1@65.358,98.505 ; GPIO40.11@142.559,98.859 ccw(c141.496,97.796) 141.496,99.3 ccw(c141.496,100.804) GPIO40.11@142.559,99.741 ; GPIO40.11@142.739,99.039 ccw(c142.109,98.409) 142.109,99.3 ccw(c142.109,100.191) GPIO40.11@142.739,99.561
GPIO18: GPIO40.12 HC-SR501.2 | length 116.5
  Top Layer w0.254: v1@97.714,98.73 cw(c97.714,97.7) 98.442,98.428 ; v1(97.714,99.238) 97.714,99.156 HC-SR501.2 106.914,98.044 v1(114.148,98.044) ; v1@97.968,99.238 ccw(c98.778,99.238) 98.205,98.665 ; v1@98.222,99.238 ccw(c99.645,99.238) 98.639,98.231 ; HC-SR501.2@102.247,94 ccw(c100.743,94) 101.806,95.064 ccw(c102.87,96.127) 102.87,94.623 ccw(c102.87,96.127) 103.934,95.064 ccw(c104.997,94) HC-SR501.2@103.493,94 ; HC-SR501.2@102.501,94 ccw(c101.61,94) 102.24,94.63 ccw(c102.87,95.26) 102.87,94.369 ccw(c102.87,95.26) 103.5,94.63 ccw(c104.13,94) HC-SR501.2@103.239,94 ; v1@113.788,97.685 ccw(c112.921,96.818) 112.921,98.044 ccw(c112.921,99.27) v1@113.788,98.403
  Bottom Layer w0.254: GPIO40.12@57.54,99.3 97.652,99.3 v1(97.714,99.238) ; GPIO40.12@57.801,99.039 cw(c58.431,98.409) 58.431,99.3 cw(c58.431,100.191) GPIO40.12@57.801,99.561 ; GPIO40.12@57.981,98.859 cw(c59.044,97.796) 59.044,99.3 cw(c59.044,100.804) GPIO40.12@57.981,99.741 ; 96.337,99.3 cw(c96.337,97.861) v1@97.355,98.879 ; 96.637,99.3 ccw(c96.637,100.314) v1@97.355,99.597 ; 96.95,99.3 cw(c96.95,98.474) v1@97.534,99.058 ; v1(114.148,98.044) 144.284,98.044 GPIO40.12@145.54,99.3 ; v1@114.507,97.685 cw(c115.374,96.818) 115.374,98.044 cw(c115.374,99.27) v1@114.507,98.403 ; GPIO40.12@144.917,99.3 cw(c143.413,99.3) 144.476,98.236 cw(c145.54,97.173) GPIO40.12@145.54,98.677 ; GPIO40.12@145.171,99.3 cw(c144.28,99.3) 144.91,98.67 cw(c145.54,98.04) GPIO40.12@145.54,98.931
GPIO19: GPIO40.35 R2.2 | length 175.5
  Top Layer w0.254: GPIO40.35@54.377,68.82 ccw(c52.873,68.82) 53.936,69.884 ccw(c55,70.947) GPIO40.35@55,69.443 ; GPIO40.35@54.631,68.82 ccw(c53.74,68.82) 54.37,69.45 ccw(c55,70.08) GPIO40.35@55,69.189 ; GPIO40.35@55,68.82 53.34,70.48 53.34,112.776 54.508,113.944 60.325,113.944 65.634,108.636 65.634,105.664 66.751,104.546 74.93,104.546 75.184,104.8 75.184,107.376 ; R2.2@74.446,107.205 cw(c75.017,106.411) 75.229,107.366 cw(c75.424,108.245) R2.2@74.613,107.856 ; R2.2@74.623,107.426 cw(c74.93,107.296) 74.93,107.63 ; R2.2@74.623,107.834 ccw(c74.93,107.964) 74.93,107.63 ; GPIO40.35@142.377,68.82 ccw(c140.873,68.82) 141.936,69.884 ccw(c143,70.947) GPIO40.35@143,69.443 ; GPIO40.35@142.631,68.82 ccw(c141.74,68.82) 142.37,69.45 ccw(c143,70.08) GPIO40.35@143,69.189 ; GPIO40.35@143,68.82 138.303,73.517 138.303,76.759 130.976,84.086 129.921,84.086 129.921,87.909 115.087,102.743 80.071,102.743 75.184,107.376 ; 74.93,107.63 R2.2 75.184,107.376 ; 74.93,107.63 75.184,107.376
GPIO20: GPIO40.38 R5.1 | length 145.3
  Top Layer w0.254: GPIO40.38@57.54,66.28 58.531,65.289 ; GPIO40.38@57.559,65.911 cw(c57.597,65.163) 58.127,65.693 cw(c58.657,66.223) GPIO40.38@57.909,66.261 ; GPIO40.38@57.572,65.658 cw(c57.637,64.395) 58.531,65.289 ; GPIO40.38@58.162,66.248 ccw(c59.425,66.183) 58.531,65.289 ; R5.1@73.698,74.621 ccw(c72.805,73.728) 72.805,74.991 ccw(c72.805,76.254) R5.1@73.698,75.361 ; R5.1 71.587,74.991 69.748,73.152 69.748,66.142 68.896,65.289 58.531,65.289
  Bottom Layer w0.254: GPIO40.38@57.54,66.28 58.722,67.462 91.313,67.462 106.914,51.861 131.947,51.861 133.139,53.053 133.139,62.273 138.278,67.412 144.408,67.412 GPIO40.38@145.54,66.28 ; GPIO40.38@57.54,66.649 ccw(c57.54,67.54) 58.17,66.91 ccw(c58.8,66.28) GPIO40.38@57.909,66.28 ; GPIO40.38@57.54,66.903 ccw(c57.54,68.407) 58.604,67.344 ccw(c59.667,66.28) GPIO40.38@58.163,66.28 ; GPIO40.38@144.917,66.28 ccw(c143.413,66.28) 144.476,67.344 ccw(c145.54,68.407) GPIO40.38@145.54,66.903 ; GPIO40.38@145.171,66.28 ccw(c144.28,66.28) 144.91,66.91 ccw(c145.54,67.54) GPIO40.38@145.54,66.649
GPIO21: GPIO40.40 R6.1 | length 141.3
  Top Layer w0.254: GPIO40.40@57.54,63.74 58.581,64.781 ; GPIO40.40@57.546,64.109 ccw(c57.559,64.955) 58.157,64.357 ccw(c58.755,63.759) GPIO40.40@57.909,63.746 ; GPIO40.40@57.55,64.363 ccw(c57.571,65.791) 58.581,64.781 ; GPIO40.40@58.163,63.75 cw(c59.591,63.771) 58.581,64.781 ; R6.1@79.497,74.67 ccw(c78.842,74.161) 78.842,74.991 ; R6.1@79.497,75.312 cw(c78.842,75.821) 78.842,74.991 ; R6.1 78.842,74.991 ; 58.581,64.781 75.449,64.781 75.946,65.278 75.946,72.095 78.842,74.991
  Bottom Layer w0.254: GPIO40.40@57.54,63.74 59.397,63.74 59.919,64.262 89.129,64.262 102.565,50.825 133.756,50.825 145.54,62.609 ; GPIO40.40@57.801,63.479 cw(c58.431,62.849) 58.431,63.74 cw(c58.431,64.631) GPIO40.40@57.801,64.001 ; GPIO40.40@57.981,63.299 cw(c59.044,62.236) 59.044,63.74 cw(c59.044,65.244) GPIO40.40@57.981,64.181 ; GPIO40.40@145.207,63.213 cw(c144.825,62.609) 145.54,62.609 ; GPIO40.40@145.54,63.74 145.54,62.609 ; GPIO40.40@145.873,63.213 ccw(c146.255,62.609) 145.54,62.609
GPIO22: GPIO40.15 | length 97.2
  Bottom Layer w0.254: GPIO40.15@55,93.597 cw(c55,92.093) 56.064,93.156 cw(c57.127,94.22) GPIO40.15@55.623,94.22 ; GPIO40.15@55,93.851 cw(c55,92.96) 55.63,93.59 cw(c56.26,94.22) GPIO40.15@55.369,94.22 ; GPIO40.15@55,94.22 56.351,92.869 103.398,92.869 104.001,93.472 104.001,94.488 104.644,95.131 142.089,95.131 ; GPIO40.15@142.381,94.292 ccw(c141.367,94.409) 142.089,95.131 ; GPIO40.15@142.633,94.262 ccw(c142.033,94.332) 142.46,94.76 ccw(c142.888,95.187) GPIO40.15@142.958,94.587 ; GPIO40.15@142.928,94.839 cw(c142.811,95.853) 142.089,95.131 ; GPIO40.15@143,94.22 142.089,95.131
GPIO23: GPIO40.16 | length 96.7
  Bottom Layer w0.254: GPIO40.16@57.54,94.22 97.268,94.22 98.704,95.656 142.367,95.656 142.545,95.479 144.281,95.479 GPIO40.16@145.54,94.22 ; GPIO40.16@57.801,93.959 cw(c58.431,93.329) 58.431,94.22 cw(c58.431,95.111) GPIO40.16@57.801,94.481 ; GPIO40.16@57.981,93.779 cw(c59.044,92.716) 59.044,94.22 cw(c59.044,95.724) GPIO40.16@57.981,94.661 ; GPIO40.16@144.917,94.22 ccw(c143.413,94.22) 144.476,95.284 ccw(c145.54,96.347) GPIO40.16@145.54,94.843 ; GPIO40.16@145.171,94.22 ccw(c144.28,94.22) 144.91,94.85 ccw(c145.54,95.48) GPIO40.16@145.54,94.589
GPIO24: GPIO40.18 | length 96.5
  Bottom Layer w0.254: GPIO40.18@57.54,91.68 128.125,91.68 129.257,92.812 144.408,92.812 GPIO40.18@145.54,91.68 ; GPIO40.18@57.801,91.419 cw(c58.431,90.789) 58.431,91.68 cw(c58.431,92.571) GPIO40.18@57.801,91.941 ; GPIO40.18@57.981,91.239 cw(c59.044,90.176) 59.044,91.68 cw(c59.044,93.184) GPIO40.18@57.981,92.121 ; GPIO40.18@144.917,91.68 ccw(c143.413,91.68) 144.476,92.744 ccw(c145.54,93.807) GPIO40.18@145.54,92.303 ; GPIO40.18@145.171,91.68 ccw(c144.28,91.68) 144.91,92.31 ccw(c145.54,92.94) GPIO40.18@145.54,92.049
GPIO25: GPIO40.22 | length 96.5
  Bottom Layer w0.254: GPIO40.22@57.54,86.6 99.695,86.6 100.827,87.732 144.408,87.732 GPIO40.22@145.54,86.6 ; GPIO40.22@57.801,86.339 cw(c58.431,85.709) 58.431,86.6 cw(c58.431,87.491) GPIO40.22@57.801,86.861 ; GPIO40.22@57.981,86.159 cw(c59.044,85.096) 59.044,86.6 cw(c59.044,88.104) GPIO40.22@57.981,87.041 ; GPIO40.22@144.917,86.6 ccw(c143.413,86.6) 144.476,87.664 ccw(c145.54,88.727) GPIO40.22@145.54,87.223 ; GPIO40.22@145.171,86.6 ccw(c144.28,86.6) 144.91,87.23 ccw(c145.54,87.86) GPIO40.22@145.54,86.969
GPIO26: GPIO40.37 R3.2 | length 214.2
  Top Layer w0.254: GPIO40.37@54.377,66.28 ccw(c52.873,66.28) 53.936,67.344 ccw(c55,68.407) GPIO40.37@55,66.903 ; GPIO40.37@54.631,66.28 ccw(c53.74,66.28) 54.37,66.91 ccw(c55,67.54) GPIO40.37@55,66.649 ; GPIO40.37@55,66.28 50.648,70.632 50.648,116.586 50.927,116.865 76.276,116.865 77.216,115.926 77.216,106.35 78.867,104.699 81.153,104.699 81.153,107.249 ; R3.2 80.772,107.63 ; R3.2@80.12,107.619 cw(c80.452,107.277) 80.788,107.614 ; R3.2@80.297,107.437 cw(c80.631,107.092) 80.971,107.431 ; R3.2@80.474,107.254 cw(c80.811,106.907) 81.153,107.249 ; R3.2@80.619,107.509 cw(c80.772,107.473) 80.772,107.63 ; R3.2@80.619,107.751 ccw(c80.772,107.787) 80.772,107.63 ; 80.772,107.63 81.153,107.249
  Bottom Layer w0.254: GPIO40.37@55,65.657 cw(c55,64.153) 56.064,65.216 cw(c57.127,66.28) GPIO40.37@55.623,66.28 ; GPIO40.37@55,65.911 cw(c55,65.02) 55.63,65.65 cw(c56.26,66.28) GPIO40.37@55.369,66.28 ; GPIO40.37@55,66.28 56.281,64.999 91.948,64.999 105.594,51.353 132.614,51.353 133.647,52.386 133.647,56.927 GPIO40.37@143,66.28 ; GPIO40.37@142.377,66.28 cw(c140.873,66.28) 141.936,65.216 cw(c143,64.153) GPIO40.37@143,65.657 ; GPIO40.37@142.631,66.28 cw(c141.74,66.28) 142.37,65.65 cw(c143,65.02) GPIO40.37@143,65.911
GPIO27: GPIO40.13 | length 96.5
  Bottom Layer w0.254: GPIO40.13@55,96.137 cw(c55,94.633) 56.064,95.696 cw(c57.127,96.76) GPIO40.13@55.623,96.76 ; GPIO40.13@55,96.391 cw(c55,95.5) 55.63,96.13 cw(c56.26,96.76) GPIO40.13@55.369,96.76 ; GPIO40.13@55,96.76 56.154,95.606 97.918,95.606 99.073,96.76 GPIO40.13@143,96.76 ; GPIO40.13@142.559,96.319 ccw(c141.496,95.256) 141.496,96.76 ccw(c141.496,98.264) GPIO40.13@142.559,97.201 ; GPIO40.13@142.739,96.499 ccw(c142.109,95.869) 142.109,96.76 ccw(c142.109,97.651) GPIO40.13@142.739,97.021
ID_SC: GPIO40.28 | length 99.5
  Bottom Layer w0.254: GPIO40.28@57.54,78.98 99.863,78.98 103.53,82.647 109.352,82.647 112.776,79.223 141.046,79.223 142.443,77.826 144.386,77.826 GPIO40.28@145.54,78.98 ; GPIO40.28@57.801,78.719 cw(c58.431,78.089) 58.431,78.98 cw(c58.431,79.871) GPIO40.28@57.801,79.241 ; GPIO40.28@57.981,78.539 cw(c59.044,77.476) 59.044,78.98 cw(c59.044,80.484) GPIO40.28@57.981,79.421 ; GPIO40.28@144.917,78.98 cw(c143.413,78.98) 144.476,77.916 cw(c145.54,76.853) GPIO40.28@145.54,78.357 ; GPIO40.28@145.171,78.98 cw(c144.28,78.98) 144.91,78.35 cw(c145.54,77.72) GPIO40.28@145.54,78.611
ID_SD: GPIO40.27 | length 98.9
  Bottom Layer w0.254: GPIO40.27@55,78.98 56.259,80.239 100.242,80.239 103.158,83.155 109.819,83.155 112.943,80.032 141.948,80.032 ; GPIO40.27@55,79.349 ccw(c55,80.24) 55.63,79.61 ccw(c56.26,78.98) GPIO40.27@55.369,78.98 ; GPIO40.27@55,79.603 ccw(c55,81.107) 56.064,80.044 ccw(c57.127,78.98) GPIO40.27@55.623,78.98 ; GPIO40.27@142.377,78.985 ccw(c140.913,78.997) 141.948,80.032 ; GPIO40.27@142.631,78.983 ccw(c141.764,78.99) 142.377,79.603 ccw(c142.99,80.216) GPIO40.27@142.997,79.349 ; GPIO40.27@142.995,79.603 cw(c142.983,81.067) 141.948,80.032 ; GPIO40.27@143,78.98 141.948,80.032
NetD1_1: G.1@68.127,115.088 R1.1 | length 15.4
  Top Layer w0.254: 67.111,105.929 ccw(c67.451,106.268) R1.1@67.785,105.923 ; 67.294,105.746 ccw(c67.63,106.083) R1.1@67.962,105.741 ; R1.1@67.463,105.609 ccw(c67.31,105.573) 67.31,105.73 ; R1.1@67.463,105.851 cw(c67.31,105.887) 67.31,105.73 ; G.1@67.604,115.088 cw(c66.341,115.088) 67.234,114.195 cw(c68.127,113.302) G.1@68.127,114.565 ; R1.1@67.608,106.106 cw(c67.271,106.453) 66.929,106.111 ; R1.1 67.31,105.73 ; G.1@68.127,115.088 66.929,113.89 66.929,106.111 ; 66.929,106.111 67.31,105.73
NetD2_1: R2.1 Y.1@74.127,115.088 | length 13.6
  Top Layer w0.254: R2.1@73.459,105.526 ccw(c73.152,105.396) 73.152,105.73 ; R2.1@73.459,105.934 cw(c73.152,106.064) 73.152,105.73 ; Y.1@73.604,115.088 cw(c72.341,115.088) 73.234,114.195 cw(c74.127,113.302) Y.1@74.127,114.565 ; R2.1 73.152,105.73 ; Y.1@74.127,115.088 72.898,113.859 72.898,105.984 73.152,105.73
NetD3_1: R3.1 R.1@80.127,115.088 | length 15.4
  Top Layer w0.254: 79.049,105.929 ccw(c79.389,106.268) R3.1@79.723,105.923 ; 79.232,105.746 ccw(c79.568,106.083) R3.1@79.9,105.741 ; R3.1@79.401,105.609 ccw(c79.248,105.573) 79.248,105.73 ; R3.1@79.401,105.851 cw(c79.248,105.887) 79.248,105.73 ; R3.1@79.546,106.106 cw(c79.209,106.453) 78.867,106.111 ; R.1@79.604,115.088 cw(c78.341,115.088) 79.234,114.195 cw(c80.127,113.302) R.1@80.127,114.565 ; R3.1 79.248,105.73 ; R.1@80.127,115.088 78.867,113.828 78.867,106.111 ; 78.867,106.111 79.248,105.73
NetD4_1: G.1@68.127,66.32 R4.2 | length 10.8
  Top Layer w0.254: G.1@67.757,66.69 ccw(c66.864,67.583) 68.127,67.583 ccw(c69.39,67.583) G.1@68.497,66.69 ; R4.2@67.829,72.721 cw(c66.936,71.828) 68.199,71.828 cw(c69.462,71.828) R4.2@68.569,72.721 ; G.1@68.127,66.32 68.127,69.647 68.199,69.719 R4.2
NetD5_1: R5.2 Y.1@74.127,66.32 | length 10.8
  Top Layer w0.254: Y.1@73.757,66.69 ccw(c72.864,67.583) 74.127,67.583 ccw(c75.39,67.583) Y.1@74.497,66.69 ; R5.2@73.798,72.721 cw(c72.905,71.828) 74.168,71.828 cw(c75.431,71.828) R5.2@74.538,72.721 ; Y.1@74.127,66.32 74.127,69.672 74.168,69.713 R5.2
NetD6_1: R6.2 R.1@80.127,66.32 | length 10.8
  Top Layer w0.254: R6.2@79.64,72.721 cw(c78.747,71.828) 80.01,71.828 cw(c81.273,71.828) R6.2@80.38,72.721 ; R.1@79.757,66.69 ccw(c78.864,67.583) 80.127,67.583 ccw(c81.39,67.583) R.1@80.497,66.69 ; R6.2 80.01,69.764 80.127,69.647 R.1@80.127,66.32
NetLS1_1: LS1.1 Q2.3 | length 21
  Top Layer w0.254: Q2.3 77.311,92.742 78.613,91.44 78.613,88.011 LS1.1 ; Q2.3@67.03,92.514 cw(c67.582,91.962) 67.582,92.742 cw(c67.582,93.522) Q2.3@67.03,92.97 ; LS1.1@78.182,88.452 ccw(c77.143,89.491) 78.613,89.491 ; LS1.1@78.362,88.272 ccw(c77.756,88.878) 78.613,88.878 ; 78.613,88.926 ccw(c79.538,88.926) LS1.1@78.884,88.272 ; 78.613,89.539 ccw(c80.151,89.539) LS1.1@79.064,88.452
NetM1_2: M1.2 Q1.3 | length 11.3
  Top Layer w0.254: M1.2 94.869,73.406 Q1.3 ; M1.2@92.075,71.085 ccw(c92.075,72.227) 92.882,71.419 ccw(c93.69,70.612) M1.2@92.548,70.612 ; Q1.3@94.641,77.503 cw(c94.089,76.951) 94.869,76.951 cw(c95.649,76.951) Q1.3@95.097,77.503
NetQ1_1: Q1.1 R8.2 | length 7.5
  Top Layer w0.254: R8.2 91.465,76.454 92.513,75.406 Q1.1 ; R8.2@90.474,76.084 cw(c91.367,75.191) 91.367,76.454 cw(c91.367,77.717) R8.2@90.474,76.824 ; Q1.1@93.691,75.178 ccw(c93.139,74.626) 93.139,75.406 ccw(c93.139,76.186) Q1.1@93.691,75.634
NetQ2_1: Q2.1 R7.2 | length 11
  Top Layer w0.254: Q2.1@65.624,90.139 cw(c65.072,89.587) 65.852,89.587 cw(c66.632,89.587) Q2.1@66.08,90.139 ; Q2.1 65.852,88.971 68.895,85.928 R7.2 ; R7.2@68.525,84.29 ccw(c67.632,85.183) 68.895,85.183 ccw(c70.158,85.183) R7.2@69.265,84.29
pads on no net: Designator4.1 Designator5.1

## Polygon pours and split planes (outlines as drawn)
GND on Bottom Layer "Top Layer-No Net" (solid, remove dead copper, pour order 4): 48.387,121.285 48.006,120.904 48.006,48.895 151.384,48.895 151.765,48.514 153.289,50.038 153.289,121.158 48.387,121.158 48.133,120.904
GND on Top Layer "Top Layer-No Net" (solid, remove dead copper, pour order 6): 48.641,121.412 48.641,49.022 152.273,49.022 152.654,48.641 151.638,49.657 151.638,122.936 50.038,122.936 48.387,121.285

## Keep-outs
Keep-Out Layer:
  lines w0.5: 50,50 150,50 150,120 50,120 50,50 ; 107.061,56.896 127.556,56.896 127.556,76.327 107.061,76.327 107.061,56.896

## Text inside footprints (layer, text, board x,y; h text height)
GPIO40: Top Overlay "39" at 54.492,61.708 h1.27 r270; Top Overlay "40" at 57.032,61.708 h1.27 r270; Top Overlay "2" at 57.032,114.54 h1.27 r270; Top Overlay "1" at 54.492,114.54 h1.27 r270
GPIO40: Top Overlay "39" at 142.492,61.708 h1.27 r270; Top Overlay "40" at 145.032,61.708 h1.27 r270; Top Overlay "2" at 145.032,114.54 h1.27 r270; Top Overlay "1" at 142.492,114.54 h1.27 r270